# EAGLE board picoAvaR12 (EAGLE 6.1)
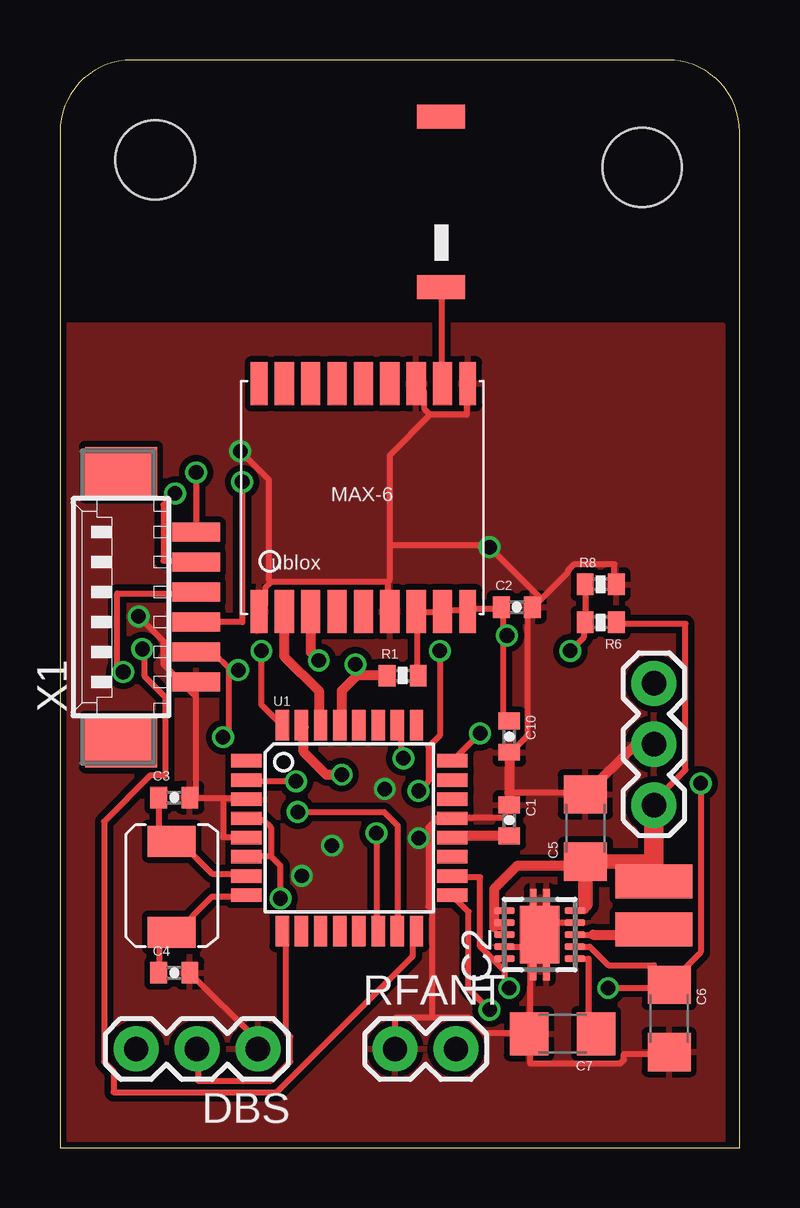
[diagram p0: board, top side]
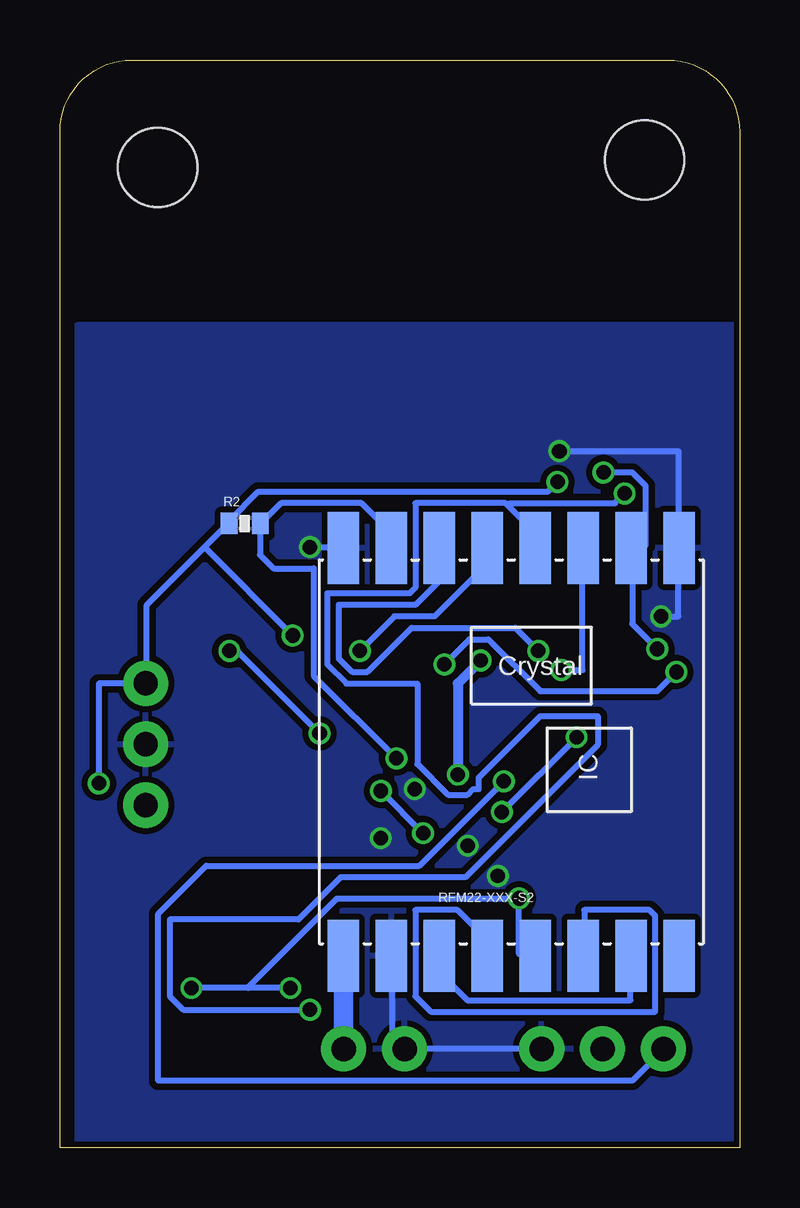
[diagram p1: board, bottom side, seen from below]

Size 28.34 x 45.35 mm. Coordinates in mm from the lower left corner, seen from the top.
Outline: 0,0 28.34,0 28.34,42.35 arc90 25.34,45.35 3,45.35 arc90 0,42.35 0,0
Copper layers (1*16): Top 0.035mm / dielectric 1.5mm / Bottom 0.035mm
Design rules: minimum track width 6mil, minimum drill 12mil, track to track 6mil, track to pad 6mil, pad to pad 6mil, via to via 6mil, smd to smd 0mil, copper to edge 10mil, drill to drill 10mil, minimum pad ring 10mil, minimum via ring 6mil, stop-mask expansion 2mil, vias tented up to drill 100mil, thermal gap 10mil
Net classes: 0 default: width 0.203 mm; 1 vcc: width 0.254 mm

## Footprints (pad centres in the part's own frame; a part is rotated, then mirrored left to right if it is on the bottom)
0402-CAP = smd 0.7 x 0.9: 1 -0.65,0; 2 0.65,0
1206 = smd 1.6 x 1.8: 1 -1.4,0; 2 1.4,0
1X03 = drill 1.016 pad 1.88: 1 0,0; 2 2.54,0; 3 5.08,0
S-PDSO-N10 = smd 0.28 x 0.85: 1 -1,-1.475; 2 -0.5,-1.475; 3 0,-1.475; 4 0.5,-1.475; 5 1,-1.475; 6 1,1.475; 7 0.5,1.475; 8 0,1.475; 9 -0.5,1.475; 10 -1,1.475 | smd 2.4 x 1.65: PP 0,0 | smd 3.8 x 0.28: PP@1 0,0.275; PP@2 0,-0.275
STAND-OFF = hole 3.302: 0,0
ELLVGG_INDUCTOR = smd 1.4 x 3.2: P$1 -3.81,0; P$2 -1.81,0
0402-RES = smd 0.7 x 0.9: 1 -0.65,0; 2 0.65,0
1X02 = drill 1.016 pad 1.88: 1 0,0; 2 2.54,0
RFM22-XXX-S2 = smd 3 x 1.3: 1 -8.5,7; 2 -8.5,5; 3 -8.5,3; 4 -8.5,1; 5 -8.5,-1; 6 -8.5,-3; 7 -8.5,-5; 8 -8.5,-7; 9 8.5,-7; 10 8.5,-5; 11 8.5,-3; 12 8.5,-1; 13 8.5,1; 14 8.5,3; 15 8.5,5; 16 8.5,7
TQFP32-08 = smd 1.27 x 0.559: 1 -4.293,2.8; 2 -4.293,2; 3 -4.293,1.2; 4 -4.293,0.4; 5 -4.293,-0.4; 6 -4.293,-1.2; 7 -4.293,-2; 8 -4.293,-2.8; 17 4.293,-2.8; 18 4.293,-2; 19 4.293,-1.2; 20 4.293,-0.4; 21 4.293,0.4; 22 4.293,1.2; 23 4.293,2; 24 4.293,2.8 | smd 0.559 x 1.27: 9 -2.8,-4.293; 10 -2,-4.293; 11 -1.2,-4.293; 12 -0.4,-4.293; 13 0.4,-4.293; 14 1.2,-4.293; 15 2,-4.293; 16 2.8,-4.293; 25 2.8,4.293; 26 2,4.293; 27 1.2,4.293; 28 0.4,4.293; 29 -0.4,4.293; 30 -1.2,4.293; 31 -2,4.293; 32 -2.8,4.293
UBLOX_MAX-6 = smd 1.8 x 0.7: 1_GND 4.95,-4.4; 9_V_RESET 4.95,4.3; 10_GND -4.55,4.3; 18_RESERVED -4.55,-4.4 | smd 1.8 x 0.8: 2_TXD1 4.95,-3.35; 3_RXD1 4.95,-2.25; 4_TIMEPULSE 4.95,-1.15; 5_EXTINT0 4.95,-0.05; 6_V_BCKP 4.95,1.05; 7_VCC_IO 4.95,2.15; 8_VCC 4.95,3.25; 11_RF_IN -4.55,3.25; 12_GND -4.55,2.15; 13_ANTON -4.55,1.05; 14_VCC_RF -4.55,-0.05; 15_RESERVED -4.55,-1.15; 16_SDA2 -4.55,-2.25; 17_SCL2 -4.55,-3.35
ABRACON_ABM3_CRYSTAL = smd 1.3 x 2: P$1 -3.4,0.1; P$2 0.4,0.1
JTI_ANTENNA-1575AT43A40 = smd 1 x 2: FEED -3.81,-1.27; NC 3.29,-1.27
53261-06 = smd 0.8 x 2: 1 3.125,-2.5; 2 1.875,-2.5; 3 0.625,-2.5; 4 -0.625,-2.5; 5 -1.875,-2.5; 6 -3.125,-2.5 | smd 2.1 x 3: S1 5.625,0.625; S2 -5.625,0.625

## Placement (x,y rotation side)
C1  0.1uF  [0402-CAP]  18.73,13.65 270 top
C2  0.1uF  [0402-CAP]  19.05,22.54 0 top
C3  18pF  [0402-CAP]  4.76,14.61 0 top
C4  18pF  [0402-CAP]  4.76,7.3 0 top
C5  10uF  [1206]  21.91,13.34 90 top
C6  10uF  [1206]  25.4,5.4 270 top
C7  10uF  [1206]  20.95,4.76 180 top
C10  0.1uF  [0402-CAP]  18.73,17.14 270 top
DBS  [1X03]  8.26,4.13 180 top
IC2  TPS61201  [S-PDSO-N10]  20,8.89 90 top
JP1  STAND-OFF  [STAND-OFF]  3.97,41.18 0 top
JP2  STAND-OFF  [STAND-OFF]  24.27,40.87 0 top
L1  2.2uH  [ELLVGG_INDUCTOR]  24.77,7.3 270 top
POWER  [1X03]  24.77,14.29 90 top
R1  10k  [0402-RES]  14.29,19.68 0 top
R2  10k  [0402-RES]  20.64,26.04 0 bottom
R6  100k  [0402-RES]  22.54,21.91 180 top
R8  10k  [0402-RES]  22.54,23.5 0 top
RFANT  [1X02]  13.97,4.13 0 top
RFM22-XXX-S2  RFM22  [RFM22-XXX-S2]  9.53,16.51 90 bottom
U1  ATMEGA328  [TQFP32-08]  12.06,13.34 0 top
U$1  UBLOX_MAX-6  [UBLOX_MAX-6]  12.7,27.3 270 top
U$2  ABRACON_ABM3_CRYSTAL  [ABRACON_ABM3_CRYSTAL]  4.76,12.38 90 top
U$3  JTI_ANTENNA-1575AT43A40  [JTI_ANTENNA-1575AT43A40]  14.61,39.69 90 top
X1  53261-06  [53261-06]  3.17,22.54 90 top

## Library data of the parts
C1-C7 C10 DBS JP1 JP2 POWER R1 R2 R6 R8 RFANT RFM22-XXX-S2 U1 = SparkFun
IC2 = texas; MPN: TPS61201DRCT; OC_FARNELL: unknown; OC_NEWARK: 37M0068
L1 U$1-U$3 = ava
X1 = con-molex; OC_FARNELL: 1125375; OC_NEWARK: unknown

## Nets
AREF: C1.2 U1.20
GND [vcc]: C1.1 C2.2 C3.2 C4.2 C5.2 C6.2 C7.2 C10.2 DBS.1 IC2.4 IC2.9 IC2.PP IC2.PP@1 IC2.PP@2 POWER.2 R8.2 RFANT.1 RFM22-XXX-S2.2 RFM22-XXX-S2.9 RFM22-XXX-S2.16 U1.3 U1.5 U1.21 U$1.1_GND U$1.6_V_BCKP U$1.10_GND U$1.12_GND X1.6
MISO: RFM22-XXX-S2.10 U1.16 X1.1
MOSI: RFM22-XXX-S2.11 U1.15 X1.5
N$3: RFANT.2 RFM22-XXX-S2.1
N$4: U$1.11_RF_IN U$3.FEED
N$5: RFM22-XXX-S2.3 RFM22-XXX-S2.7
N$6: RFM22-XXX-S2.4 RFM22-XXX-S2.6
N$7: IC2.3 L1.P$2
N$9: C3.1 U1.7 U$2.P$2
N$10: C4.1 U1.8 U$2.P$1
N$11: C7.1 IC2.1
NSS_RX: DBS.2 U1.9
NSS_TX: DBS.3 U1.2
RESET: R1.1 U1.29 X1.3
RFM22_NIRQ: RFM22-XXX-S2.14 U1.32
RFM22_NSEL: RFM22-XXX-S2.13 U1.14
RFM22_SDN: R2.2 RFM22-XXX-S2.15 U1.26
SCK: RFM22-XXX-S2.12 U1.17 X1.2
UBLOX_RXD: U1.31 U$1.3_RXD1
UBLOX_TXD: U1.30 U$1.2_TXD1
VBATT [vcc]: C5.1 IC2.5 IC2.6 IC2.7 IC2.8 L1.P$1 POWER.1 R6.1
VBATTADC: R6.2 R8.1 U1.24
VCC: C2.1 C6.1 C10.1 IC2.2 IC2.10 POWER.3 R1.2 R2.1 RFM22-XXX-S2.5 U1.4 U1.6 U1.18 U$1.7_VCC_IO U$1.8_VCC U$1.9_V_RESET X1.4

## Tracks (layer width: path | path; a pad name or v marks a point on that pad's centre or on a via)
AREF
  Top 0.406: C1.2 16.43,13 U1.20
GND  (via drill 0.6, 0.61)
  Top 0.254: IC2.4 20.32,9.39 20.32,8.96 | 20.32,8.96 20.32,8.89 | IC2.PP@1 IC2.PP 20.07,8.88 20.16,8.88 IC2.PP@2 20.32,8.96 | IC2.9 19.73,8.39 IC2.PP@1 | C7.2 19.59,4.8 19.59,8.32 IC2.PP@1 | C6.2 25.36,3.92 23.52,3.92 23.52,3.68 23.36,3.52 19.59,3.52 19.59,4.64 C7.2 | C4.2 8.23,4.48 8.23,4.16 DBS.1 | 15.52,5.44 13.99,5.44 13.99,4.16 RFANT.1 | 15.52,5.44 17.04,5.44 17.68,4.8 19.43,4.8 C7.2 | 6.79,14.56 7.75,14.56 U1.3 | 6.79,14.56 5.43,14.56 C3.2 5.67,14.64 5.67,18.88 | 6.79,14.56 6.79,12.96 7.75,12.96 U1.5 | 5.67,18.88 X1.6 | v3.27,22.16 4.32,21.12 4.32,20.16 5.59,18.88 5.67,18.88 | 15.44,30.56 15.2,30.8 15.2,31.52 14.88,31.84 U$1.12_GND | 15.44,30.56 16.95,30.56 16.95,31.84 U$1.10_GND | 8.79,23.6 8.55,23.36 8.55,22.64 8.31,22.4 U$1.1_GND | 13.68,23.6 8.79,23.6 | 13.68,23.6 13.68,22.4 U$1.6_V_BCKP | 15.44,30.56 13.76,28.88 13.76,25.12 | 13.76,25.12 13.76,23.68 13.68,23.6 | C2.2 19.75,22.56 21.2,24 21.2,24.08 21.43,24.32 23.11,24.32 23.11,23.52 R8.2 | C1.1 18.55,14.24 18.55,13.76 16.39,13.76 U1.21 16.23,13.76 15.76,13.76 15.36,13.36 15.36,10.08 15.52,9.92 15.52,5.44 | 18.73,14.8 21.75,14.8 C5.2 | C2.2 19.59,22.48 19.52,22.4 19.52,17.2 18.88,16.56 C10.2 | C2.2 20,22.96 v17.91,25.04 17.84,25.12 13.76,25.12 | v7.51,29.04 8.71,27.84 8.71,23.68 8.79,23.6
  Top 0.406: POWER.2 24,16.83 C5.2 | C10.2 18.73,14.8 C1.1
  Bottom 0.254: RFM22-XXX-S2.2 14.47,8 14.47,4.16 13.99,4.16 RFANT.1 13.91,4.16 8.31,4.16 DBS.1 | v3.27,22.16 2.56,22.16 2.56,24.96 RFM22-XXX-S2.9 2.56,25.12 2.56,29.04 v7.51,29.04 | v17.91,25.04 16.55,25.04 RFM22-XXX-S2.16
  other vias: 11.34,12.6 13.54,14.96 14.96,12.91 10.08,11.34
  pour Top (isolate 0.254): 0,34.29 27.62,34.29 27.62,0 0,0
  pour Bottom (isolate 0.254): 0,34.29 27.62,34.29 27.62,0 0,0
MISO  (via drill 0.61)
  Top 0.254: v3.44,20.8 3.52,20.72 3.52,19.68 4.39,18.8 4.39,15.52 3.75,15.52 1.83,13.6 1.83,3.6 2.23,3.2 2.23,2.32 9.04,2.32 14.71,8 14.71,8.96 14.79,9.04 U1.16 | v5.67,28.16 X1.1
  Bottom 0.254: v3.44,20.8 4.47,21.84 4.47,24.96 RFM22-XXX-S2.10 4.47,25.12 3.92,25.12 3.92,27.6 4.47,28.16 v5.67,28.16
MOSI  (via drill 0.61)
  Top 0.254: v9.91,14 13.52,14 14.07,13.44 14.07,9.12 U1.15 | v6.79,17.12 7.04,17.36 7.04,19.92 | 7.04,19.92 7.04,20 6.39,20.64 5.67,20.64 X1.5 | 7.04,19.92 v7.43,19.92
  Bottom 0.254: v6.79,17.12 v9.91,14 | v7.43,19.92 6.55,19.92 6.55,24.96 RFM22-XXX-S2.11
N$3
  Bottom 0.254: 16.51,8 RFM22-XXX-S2.1
  Bottom 0.813: RFANT.2 16.51,8
N$4
  Top 0.254: U$1.11_RF_IN 15.91,31.92 15.91,35.84 U$3.FEED
N$5
  Bottom 0.254: RFM22-XXX-S2.7 4.55,8 4.55,6.16 11.36,6.16 12.47,7.28 12.47,8 RFM22-XXX-S2.3
N$6
  Bottom 0.254: RFM22-XXX-S2.6 6.47,8.08 6.47,9.92 3.75,9.92 3.52,9.68 3.52,5.68 12.88,5.68 13.52,6.32 13.52,9.92 11.76,9.92 10.55,8.72 10.55,8.08 RFM22-XXX-S2.4
N$7
  Top 0.254: IC2.3 22.23,8.89
  Top 0.406: 24.77,9.21 L1.P$2 24.77,8.89 22.23,8.89
N$9
  Top 0.254: C3.1 4.11,12.71 4.13,12.7 4.58,12.7 | 4.58,12.7 U$2.P$2 | 4.58,12.7 5.08,12.7 6.35,11.43 7.87,11.43 | 7.94,11.43 7.87,11.43 | 7.87,11.43 U1.7
N$10
  Top 0.254: C4.1 4.13,7.32 4.13,8.89 4.22,8.98 U$2.P$1 4.75,8.89 4.76,8.89 6.35,10.48 7.71,10.48 U1.8
  Top 0.406: 4.45,8.89 4.76,8.89
N$11
  Top 0.254: IC2.1 22.04,7.89 22.04,4.89 21.91,4.76 22.23,4.76 22.32,4.8 C7.1
NSS_RX
  Top 0.254: U1.9 9.44,8.88 9.44,4.8 9.6,4.64 9.6,3.6 8.79,2.8 5.75,2.8 5.75,4.08 DBS.2
NSS_TX  (via drill 0.61)
  Top 0.254: v9.84,15.28 7.83,15.28 U1.2
  Bottom 0.254: v9.84,15.28 13.36,11.76 22.23,11.76 24.23,9.76 24.23,2.8 4.47,2.8 3.19,4.08 DBS.3
RESET  (via drill 0.61)
  Top 0.254: v2.63,19.84 2.4,20.08 2.4,23.12 5.67,23.12 X1.3 | v12.31,20.16 12.31,19.84 12.38,19.68
  Top 0.406: R1.1 12.38,19.68 11.75,19.05 11.75,17.71 U1.29
  Bottom 0.254: v2.63,19.84 3.44,19.04 8.31,19.04 10.47,21.2 11.28,21.2 v12.31,20.16
RFM22_NIRQ  (via drill 0.61)
  Top 0.254: v8.39,20.72 8.39,18.48 9.2,17.68 U1.32
  Bottom 0.254: v8.39,20.72 9.36,21.68 13.68,21.68 15.52,19.84 16.16,19.84 16.71,20.4 16.71,22.64 13.52,22.64 12.55,23.6 12.55,24.96 RFM22-XXX-S2.14
RFM22_NSEL  (via drill 0.61)
  Top 0.254: v13.2,13.12 13.2,9.12 U1.14 | v14.96,14.88 15.36,15.28 15.36,16.72 15.84,17.2 v15.84,20.72
  Bottom 0.254: v14.96,14.88 v13.2,13.12 | v15.84,20.72 14.39,22.16 12.71,22.16 10.55,24.32 10.55,24.96 RFM22-XXX-S2.13
RFM22_SDN  (via drill 0.61)
  Top 0.254: v14.31,16.24 14.23,16.32 14.23,17.44 14.07,17.6 U1.26
  Bottom 0.254: RFM22-XXX-S2.15 14.55,25.04 14.55,25.68 15.76,26.88 19.11,26.88 19.91,26.08 R2.2 20,25.92 20,24.72 19.43,24.16 17.75,24.16 17.75,19.68 v14.31,16.24
SCK  (via drill 0.61)
  Top 0.254: v17.91,5.76 17.04,6.64 17.04,9.84 16.39,10.48 U1.17 | v4.79,27.28 4.32,26.8 4.32,24.48 5.67,24.48 X1.2
  Bottom 0.254: v17.91,5.76 23.2,5.76 23.75,6.32 23.75,9.52 18.39,9.52 16.64,11.28 11.44,11.28 5.92,16.8 5.92,18 8.31,18 10.88,15.44 10.88,14.96 11.12,14.96 11.36,14.72 12.15,14.72 13.44,16 13.44,19.36 16.39,19.36 17.2,20.16 17.2,23.12 13.76,23.12 13.52,23.36 13.52,26.88 9.76,26.88 9.68,26.8 | 9.68,26.8 8.55,25.68 8.55,25.04 RFM22-XXX-S2.12 | v4.79,27.28 5.2,26.88 9.6,26.88 9.68,26.8
UBLOX_RXD  (via drill 0.6)
  Top 0.406: U$1.3_RXD1 10.45,20.66 v10.79,20.32 | v11.75,15.56 11.11,15.56 10.16,16.51 10.16,17.53 U1.31
  Bottom 0.406: v10.79,20.32 11.75,19.37 v11.75,15.56
UBLOX_TXD
  Top 0.406: U$1.2_TXD1 9.35,20.5 10.79,19.05 10.79,17.7 U1.30
VBATT
  Top 0.254: 21.91,10.16 21.91,9.89 IC2.5 21.64,9.89 21.91,10.16 | 21.91,10.16 21.91,11.43 21.59,11.75 | 18.1,9.21 18.34,9.21 IC2.7 IC2.8 | IC2.6 18.14,9.89 18.1,9.84 | R6.1 23.2,21.84 26.07,21.84 26.07,15.76 24.95,14.64 POWER.1
  Top 0.406: 21.59,11.75 19.05,11.75 18.1,10.79 18.1,9.84 18.1,9.21
  Top 0.61: 21.91,10.16 C5.1 24.77,11.94 L1.P$1
  Top 0.813: L1.P$1 POWER.1
VBATTADC  (via drill 0.61)
  Top 0.254: R8.1 21.91,23.44 21.91,21.92 R6.2 21.84,21.84 21.84,21.28 v21.27,20.72 | v17.52,17.28 16.39,16.16 U1.24
  Bottom 0.254: v17.52,17.28 20.95,20.72 v21.27,20.72
VCC  (via drill 0.6, 0.61)
  Top 0.254: IC2.10 18.53,7.44 | 18.53,7.44 18.53,6.87 v18.73,6.67 | v22.86,6.67 24.77,6.67 24.77,6.8 | IC2.2 22.09,8.39 22.86,7.62 24.77,7.62 24.77,6.8 | 8.79,12.16 7.83,12.16 U1.6 | 8.79,12.16 8.79,13.36 8.47,13.68 7.83,13.68 U1.4 | 8.79,12.16 9.2,11.76 v9.2,10.4 | U1.18 16.39,11.28 17.52,11.28 17.52,8.4 18.48,7.44 18.53,7.44 | 24.77,6.8 25.36,6.8 C6.1 25.43,6.88 26.71,8.16 v26.71,15.2 | R1.2 14.88,19.76 14.88,22.32 U$1.7_VCC_IO 14.96,22.32 15.84,22.32 U$1.8_VCC 15.99,22.4 16.88,22.4 U$1.9_V_RESET 17.04,22.4 17.04,22.48 18.39,22.48 C2.1 18.48,22.4 18.48,21.36 | 18.48,21.36 18.48,18.08 18.71,17.84 C10.1 | v7.59,27.76 7.59,21.92 X1.4 | v18.64,21.36 18.48,21.36
  Bottom 0.254: v18.73,6.67 20.48,6.67 | 20.48,6.67 v22.86,6.67 | RFM22-XXX-S2.5 8.55,8.08 9.2,8.08 v9.2,10.4 16.8,10.4 20.48,6.72 20.48,6.67 | 22.32,25.04 24.71,22.64 24.71,19.44 POWER.3 24.88,19.36 26.71,19.36 v26.71,15.2 | 22.32,25.04 21.36,26 R2.1 21.27,26.16 20.07,27.36 8,27.36 v7.59,27.76 | 22.32,25.04 v18.64,21.36